# EAGLE board TastsensorX6 (EAGLE 5.00), part 1 of 2
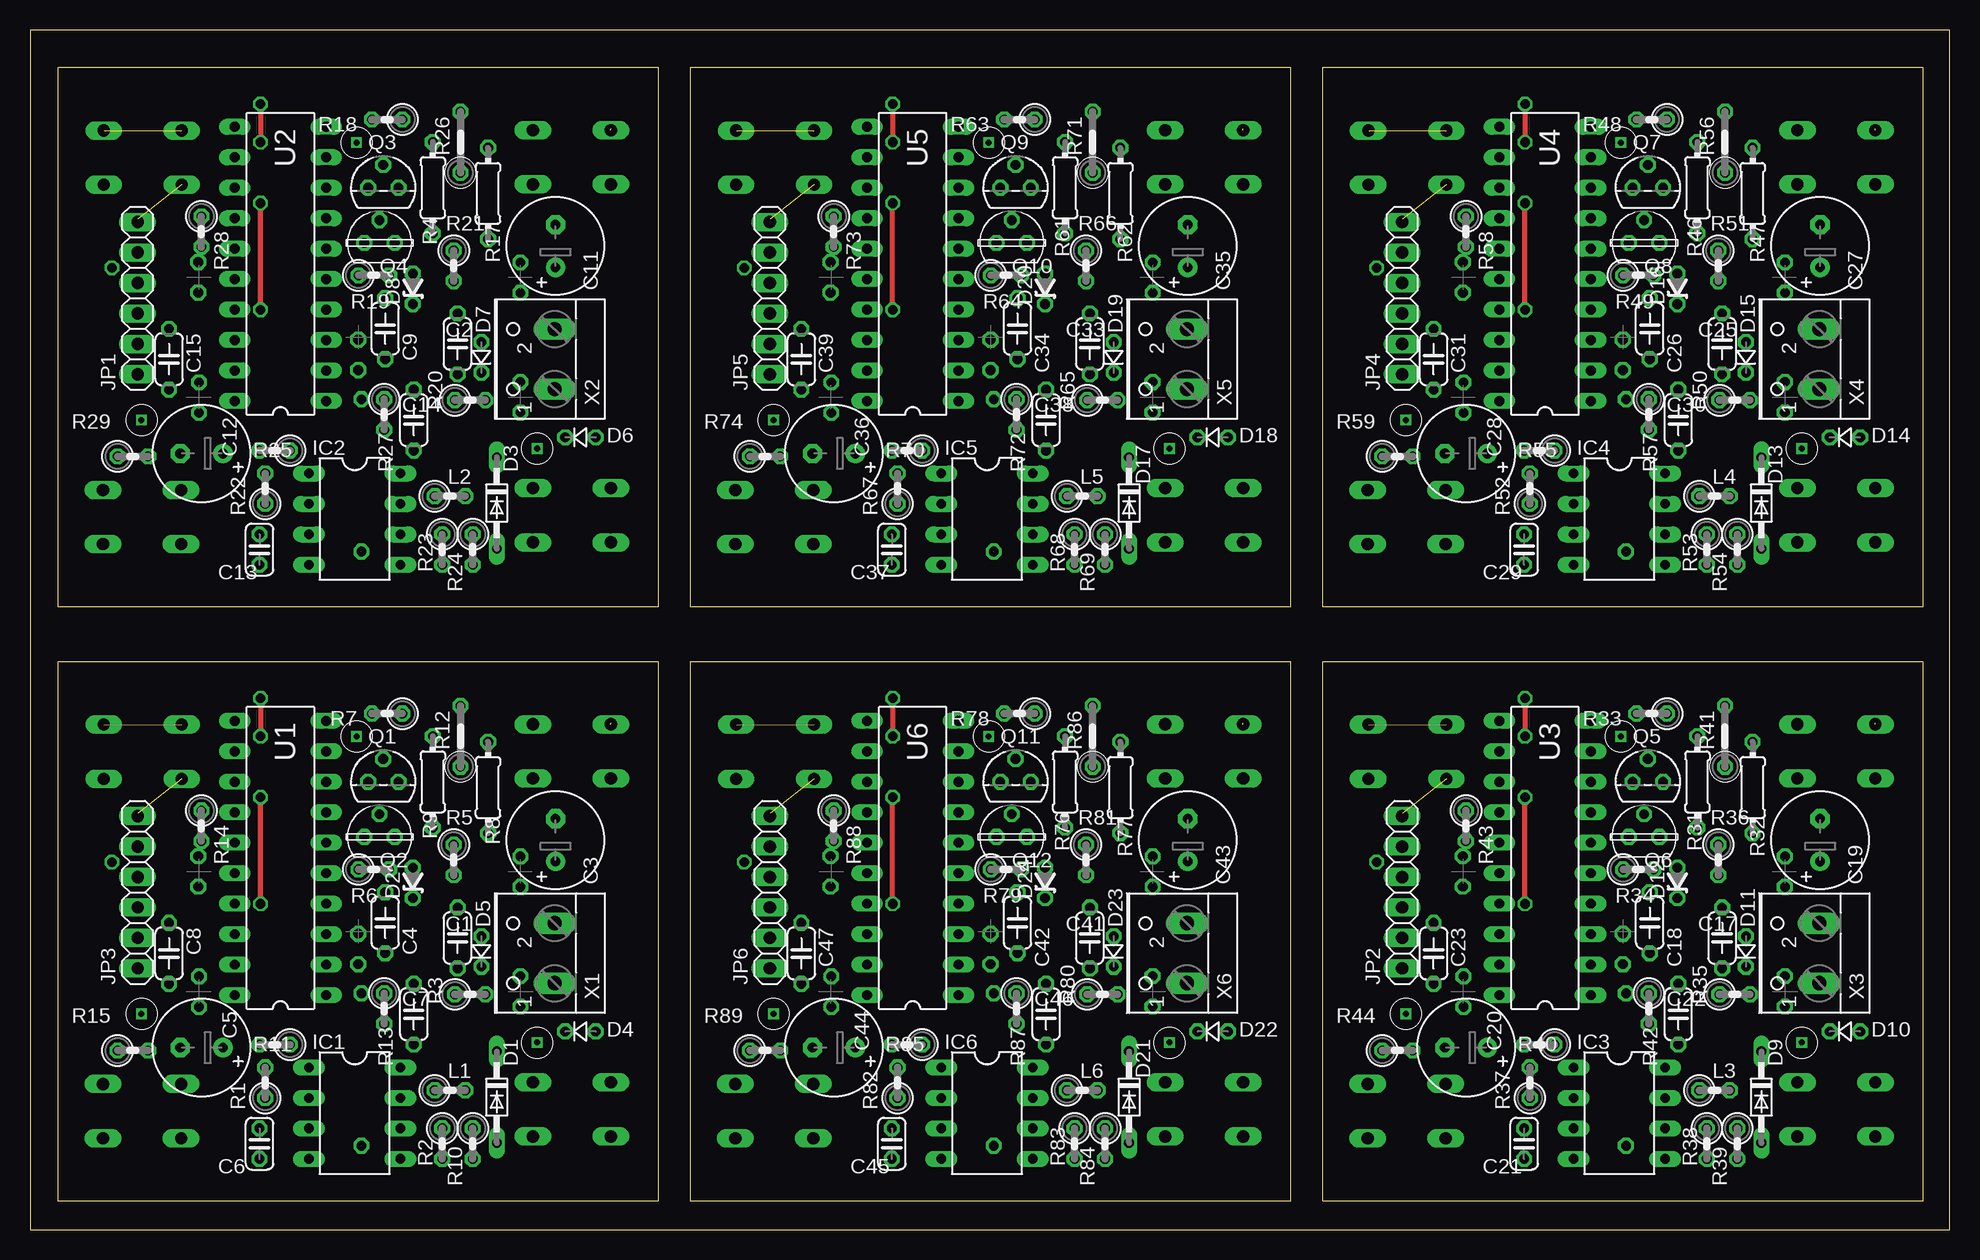
[diagram p0: board, top side]
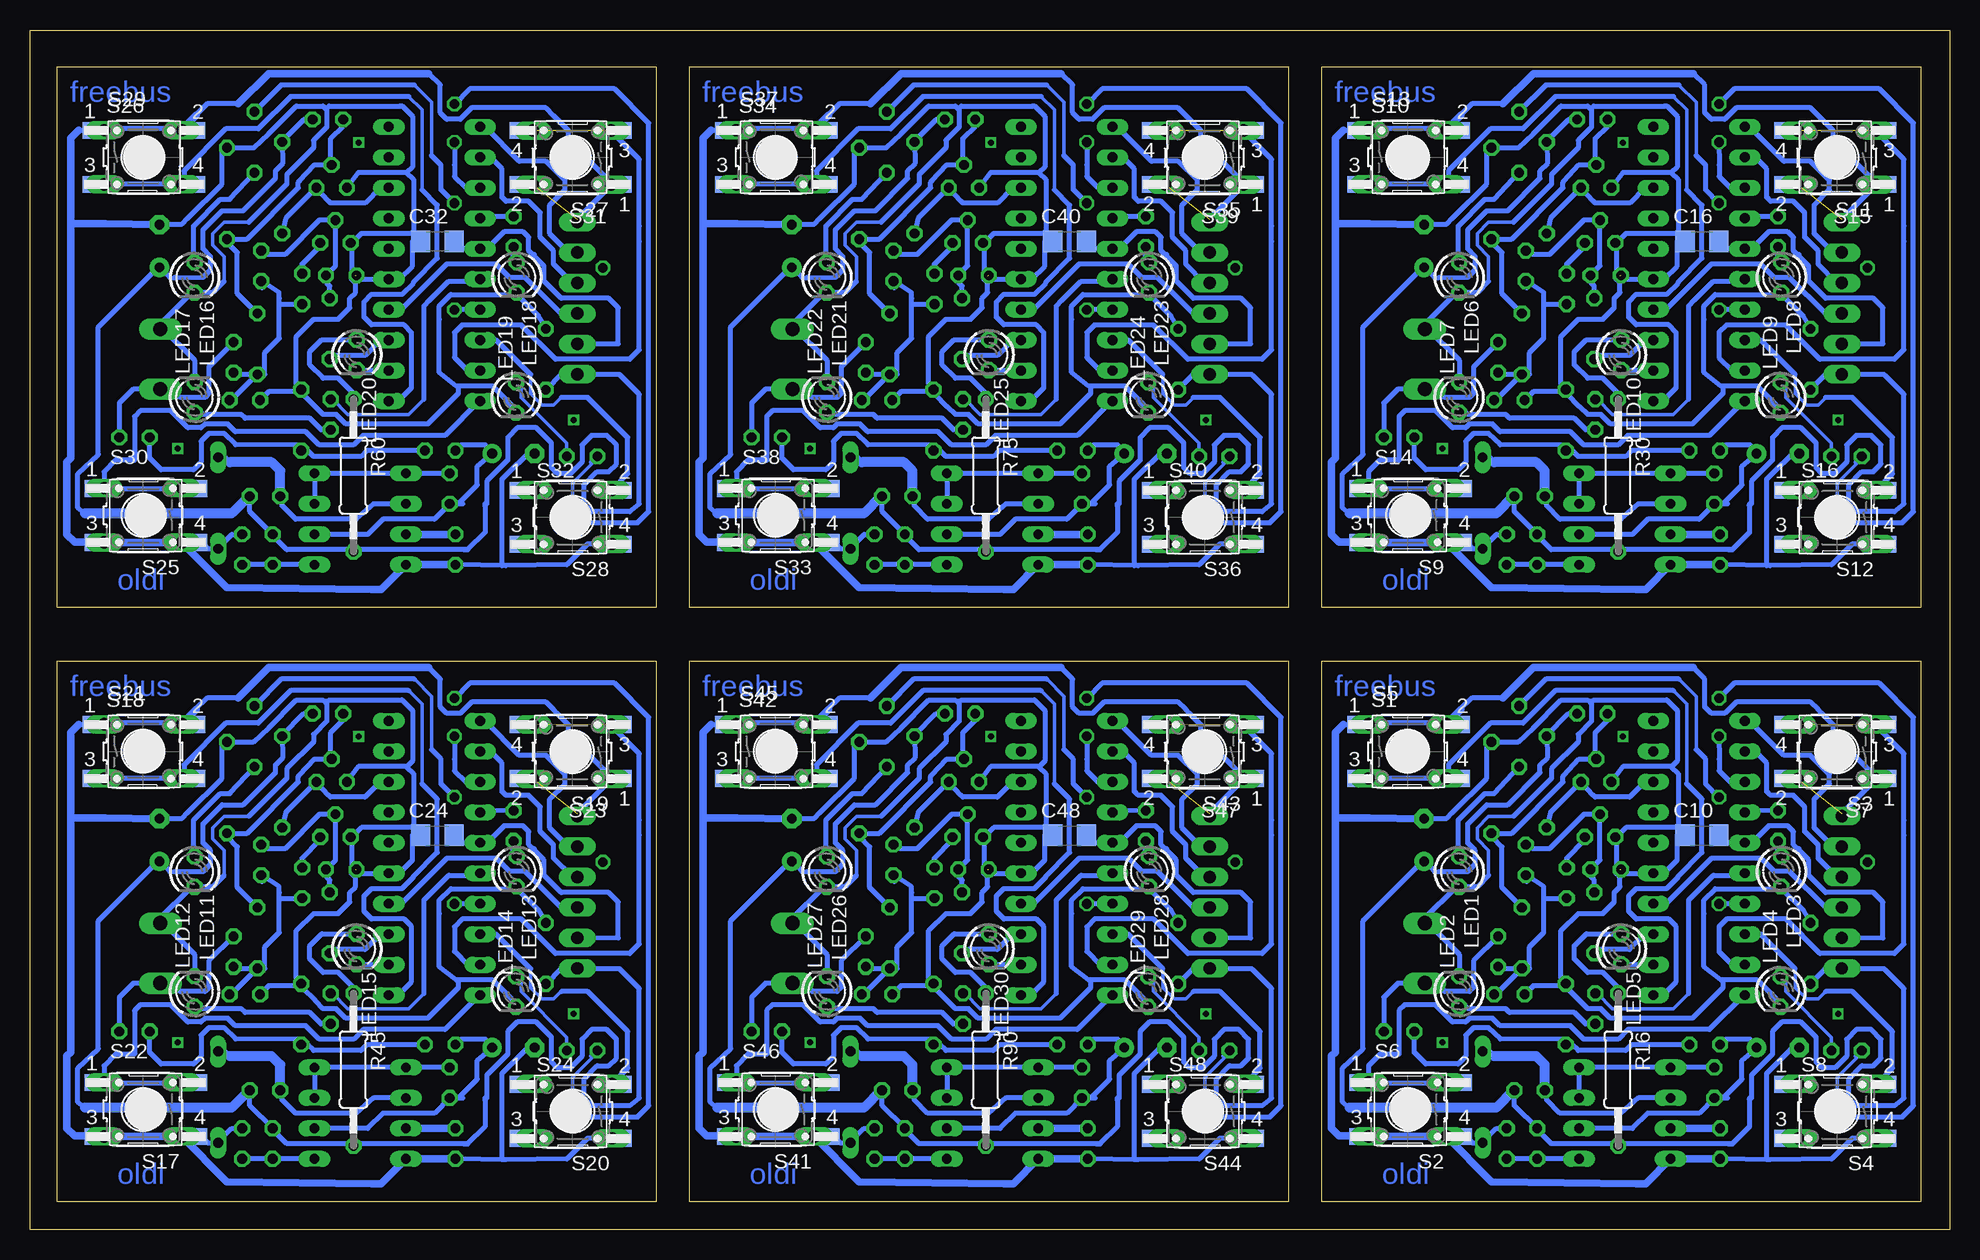
[diagram p1: board, bottom side, seen from below]

Size 160 x 100 mm. Coordinates in mm from the lower left corner, seen from the top.
Outline: 52.34,2.36 2.34,2.36 2.34,47.36 52.34,47.36 52.34,2.36
Outline: 0,0 160,0 160,100 0,100 0,0
Outline: 52.34,51.89 2.34,51.89 2.34,96.89 52.34,96.89 52.34,51.89
Outline: 157.75,2.36 107.75,2.36 107.75,47.36 157.75,47.36 157.75,2.36
Outline: 157.75,51.89 107.75,51.89 107.75,96.89 157.75,96.89 157.75,51.89
Outline: 105.05,51.89 55.05,51.89 55.05,96.89 105.05,96.89 105.05,51.89
Outline: 105.05,2.36 55.05,2.36 55.05,47.36 105.05,47.36 105.05,2.36
Copper layers (1*16): Top 0.035mm / dielectric 1.5mm / Bottom 0.035mm
Design rules "default": minimum track width 10mil, minimum drill 24mil, track to track 8mil, track to pad 8mil, pad to pad 8mil, via to via 8mil, smd to smd 8mil, copper to edge 40mil, drill to drill 8mil, minimum pad ring 10mil, minimum via ring 8mil, stop-mask expansion 4mil, vias tented up to drill 0mil, thermal gap 10mil
tKeepout: area 18.6,46.4 to 36.1,47.4; area 2.3,2.4 to 6.4,47.3; area 2.4,2.4 to 52.3,3.4; area 48.2,2.4 to 52.3,47.3; area 42,40.6 to 48.2,47.3; area 38.5,44 to 41.9,47.3; area 36.9,45.6 to 38.5,47.3; area 45.3,37.3 to 48.1,40.6; area 46.9,35.8 to 48.2,37.3; area 43.7,39 to 45.3,40.6; area 40.3,42.3 to 41.9,44; area 43.2,3.2 to 48.3,10; 210 more areas; 60 lines
bKeepout: area 20.6,20.3 to 21.9,23.6; area 32.8,20.3 to 34.1,30.3; area 47.3,19.6 to 52.3,29.6; area 17.1,20.2 to 22.1,30.2; area 32.7,20.4 to 37.7,30.4; area 2.3,19.6 to 7.3,29.6; area 2.3,2.4 to 52.3,5.1; area 2.3,44.6 to 52.3,47.4; area 24.7,40.6 to 29.8,41.6; area 41.8,13.4 to 42.8,17.8; area 8.8,15.8 to 9.8,20.2; area 50.1,2.4 to 52.3,47.4; 66 more areas

## Footprints (pad centres in the part's own frame; a part is rotated, then mirrored left to right if it is on the bottom)
C050-024X044 = drill 0.813 octagon: 1 -2.54,0; 2 2.54,0
E3,5-8 = drill 0.813 pad 1.6 round: + -1.778,0 | drill 0.813 pad 1.6 octagon: - 1.778,0
C025-024X044 = drill 0.813 octagon: 1 -1.27,0; 2 1.27,0
C1206 = smd 1.6 x 1.8: 1 -1.4,0; 2 1.4,0
DO34-7 = drill 0.813 long: A 3.81,0; C -3.81,0
ZDIO-2.5 = drill 0.813 octagon: A 1.27,0; C -1.27,0
D-2.5 = drill 0.813 octagon: A 1.27,0; C -1.27,0
DIL08 = drill 0.813 long: 1 -3.81,-3.81; 2 -1.27,-3.81; 3 1.27,-3.81; 4 3.81,-3.81; 5 3.81,3.81; 6 1.27,3.81; 7 -1.27,3.81; 8 -3.81,3.81
1X06 = drill 1.016 long: 1 -6.35,0; 2 -3.81,0; 3 -1.27,0; 4 1.27,0; 5 3.81,0; 6 6.35,0
0207/2V@2 = drill 0.813 octagon: 1 -1.27,0; 2 1.27,0
LED3MM = drill 0.813 octagon: A -1.27,0; K 1.27,0
TO92 = drill 0.813 octagon: 1 1.27,0; 2 0,1.905; 3 -1.27,0
TO237 = drill 0.813 octagon: 1 1.27,0; 2 0,1.905; 3 -1.27,0
0207/2V = drill 0.813 octagon: 1 -1.27,0; 2 1.27,0
0204/7 = drill 0.813 octagon: 1 -3.81,0; 2 3.81,0
0207/5V = drill 0.813 octagon: 1 -2.54,0; 2 2.54,0
0207/12 = drill 0.813 octagon: 1 -6.35,0; 2 6.35,0
B3F-10XX = drill 1.016 long: 1 -3.251,2.261; 2 3.251,2.261; 3 -3.251,-2.261; 4 3.251,-2.261
TASTER-9314_SMD = smd 2.1 x 1.4: 1 -4.048,2.25; 2 4.048,2.25; 3 -4.048,-2.25; 4 4.048,-2.25
DIL20 = drill 0.813 long: 1 -11.43,-3.81; 2 -8.89,-3.81; 3 -6.35,-3.81; 4 -3.81,-3.81; 5 -1.27,-3.81; 6 1.27,-3.81; 7 3.81,-3.81; 8 6.35,-3.81; 9 8.89,-3.81; 10 11.43,-3.81; 11 11.43,3.81; 12 8.89,3.81; 13 6.35,3.81; 14 3.81,3.81; 15 1.27,3.81; 16 -1.27,3.81; 17 -3.81,3.81; 18 -6.35,3.81; 19 -8.89,3.81; 20 -11.43,3.81
W237-102 = drill 1.194 long: 1 -2.5,-1.27; 2 2.5,-1.27

## Placement (x,y rotation side)
C1  100n  [C050-024X044]  35.64,24.3 90 top
C2  100n  [C050-024X044]  35.64,73.83 90 top
C3  100µ  [E3,5-8]  43.8,32.46 90 top
C4  100n  [C050-024X044]  29.61,25.57 270 top
C5  100µ  [E3,5-8]  14.3,15.16 180 top
C6  470p  [C025-024X044]  19.13,7.16 270 top
C7  100n  [C050-024X044]  31.99,17.95 270 top
C8  100n  [C050-024X044]  11.59,23.02 270 top
C9  100n  [C050-024X044]  29.61,75.1 270 top
C10  [C1206]  20.64,32.86 0 bottom
C11  100µ  [E3,5-8]  43.8,81.99 90 top
C12  100µ  [E3,5-8]  14.3,64.69 180 top
C13  470p  [C025-024X044]  19.13,56.69 270 top
C14  100n  [C050-024X044]  31.99,67.48 270 top
C15  100n  [C050-024X044]  11.59,72.55 270 top
C16  [C1206]  20.64,82.39 0 bottom
C17  100n  [C050-024X044]  141.05,24.3 90 top
C18  100n  [C050-024X044]  135.02,25.57 270 top
C19  100µ  [E3,5-8]  149.21,32.46 90 top
C20  100µ  [E3,5-8]  119.71,15.16 180 top
C21  470p  [C025-024X044]  124.54,7.16 270 top
C22  100n  [C050-024X044]  137.4,17.95 270 top
C23  100n  [C050-024X044]  117,23.02 270 top
C24  [C1206]  126.05,32.86 0 bottom
C25  100n  [C050-024X044]  141.05,73.83 90 top
C26  100n  [C050-024X044]  135.02,75.1 270 top
C27  100µ  [E3,5-8]  149.21,81.99 90 top
C28  100µ  [E3,5-8]  119.71,64.69 180 top
C29  470p  [C025-024X044]  124.54,56.69 270 top
C30  100n  [C050-024X044]  137.4,67.48 270 top
C31  100n  [C050-024X044]  117,72.55 270 top
C32  [C1206]  126.05,82.39 0 bottom
C33  100n  [C050-024X044]  88.34,73.83 90 top
C34  100n  [C050-024X044]  82.31,75.1 270 top
C35  100µ  [E3,5-8]  96.51,81.99 90 top
C36  100µ  [E3,5-8]  67.01,64.69 180 top
C37  470p  [C025-024X044]  71.83,56.69 270 top
C38  100n  [C050-024X044]  84.69,67.48 270 top
C39  100n  [C050-024X044]  64.29,72.55 270 top
C40  [C1206]  73.34,82.39 0 bottom
C41  100n  [C050-024X044]  88.34,24.3 90 top
C42  100n  [C050-024X044]  82.31,25.57 270 top
C43  100µ  [E3,5-8]  96.51,32.46 90 top
C44  100µ  [E3,5-8]  67.01,15.16 180 top
C45  470p  [C025-024X044]  71.83,7.16 270 top
C46  100n  [C050-024X044]  84.69,17.95 270 top
C47  100n  [C050-024X044]  64.29,23.02 270 top
C48  [C1206]  73.34,32.86 0 bottom
D1  BAT46  [DO34-7]  38.91,11.03 270 top
D2  18V  [ZDIO-2.5]  31.91,28.89 90 top
D3  BAT46  [DO34-7]  38.91,60.56 270 top
D4  4148  [D-2.5]  45.88,16.51 0 top
D5  4148  [D-2.5]  37.62,23.18 90 top
D6  4148  [D-2.5]  45.88,66.04 0 top
D7  4148  [D-2.5]  37.62,72.71 90 top
D8  18V  [ZDIO-2.5]  31.91,78.42 90 top
D9  BAT46  [DO34-7]  144.32,11.03 270 top
D10  4148  [D-2.5]  151.29,16.51 0 top
D11  4148  [D-2.5]  143.03,23.18 90 top
D12  18V  [ZDIO-2.5]  137.32,28.89 90 top
D13  BAT46  [DO34-7]  144.32,60.56 270 top
D14  4148  [D-2.5]  151.29,66.04 0 top
D15  4148  [D-2.5]  143.03,72.71 90 top
D16  18V  [ZDIO-2.5]  137.32,78.42 90 top
D17  BAT46  [DO34-7]  91.61,60.56 270 top
D18  4148  [D-2.5]  98.58,66.04 0 top
D19  4148  [D-2.5]  90.33,72.71 90 top
D20  18V  [ZDIO-2.5]  84.61,78.42 90 top
D21  BAT46  [DO34-7]  91.61,11.03 270 top
D22  4148  [D-2.5]  98.58,16.51 0 top
D23  4148  [D-2.5]  90.33,23.18 90 top
D24  18V  [ZDIO-2.5]  84.61,28.89 90 top
IC1  MC34063AP  [DIL08]  27.07,9.7 270 top
IC2  MC34063AP  [DIL08]  27.07,59.23 270 top
IC3  MC34063AP  [DIL08]  132.48,9.7 270 top
IC4  MC34063AP  [DIL08]  132.48,59.23 270 top
IC5  MC34063AP  [DIL08]  79.77,59.23 270 top
IC6  MC34063AP  [DIL08]  79.77,9.7 270 top
JP1  [1X06]  8.97,77.64 90 top
JP2  [1X06]  114.38,28.11 90 top
JP3  [1X06]  8.97,28.11 90 top
JP4  [1X06]  114.38,77.64 90 top
JP5  [1X06]  61.67,77.64 90 top
JP6  [1X06]  61.67,28.11 90 top
L1  220µ  [0207/2V@2]  35,11.6 0 top
L2  220µ  [0207/2V@2]  35,61.13 0 top
L3  220µ  [0207/2V@2]  140.41,11.6 0 top
L4  220µ  [0207/2V@2]  140.41,61.13 0 top
L5  220µ  [0207/2V@2]  87.71,61.13 0 top
L6  220µ  [0207/2V@2]  87.71,11.6 0 top
LED1  [LED3MM]  40.87,29.83 270 bottom
LED2  [LED3MM]  40.87,19.86 90 bottom
LED3  [LED3MM]  14.02,29.85 270 bottom
LED4  [LED3MM]  14.08,19.83 270 bottom
LED5  [LED3MM]  27.36,23.39 270 bottom
LED6  [LED3MM]  40.87,79.36 270 bottom
LED7  [LED3MM]  40.87,69.39 90 bottom
LED8  [LED3MM]  14.02,79.38 270 bottom
LED9  [LED3MM]  14.08,69.36 270 bottom
LED10  [LED3MM]  27.36,72.92 270 bottom
LED11  [LED3MM]  146.28,29.83 270 bottom
LED12  [LED3MM]  146.28,19.86 90 bottom
LED13  [LED3MM]  119.43,29.85 270 bottom
LED14  [LED3MM]  119.49,19.83 270 bottom
LED15  [LED3MM]  132.77,23.39 270 bottom
LED16  [LED3MM]  146.28,79.36 270 bottom
LED17  [LED3MM]  146.28,69.39 90 bottom
LED18  [LED3MM]  119.43,79.38 270 bottom
LED19  [LED3MM]  119.49,69.36 270 bottom
LED20  [LED3MM]  132.77,72.92 270 bottom
LED21  [LED3MM]  93.58,79.36 270 bottom
LED22  [LED3MM]  93.58,69.39 90 bottom
LED23  [LED3MM]  66.72,79.38 270 bottom
LED24  [LED3MM]  66.79,69.36 270 bottom
LED25  [LED3MM]  80.07,72.92 270 bottom
LED26  [LED3MM]  93.58,29.83 270 bottom
LED27  [LED3MM]  93.58,19.86 90 bottom
LED28  [LED3MM]  66.72,29.85 270 bottom
LED29  [LED3MM]  66.79,19.83 270 bottom
LED30  [LED3MM]  80.07,23.39 270 bottom
Q1  BC557  [TO92]  29.45,37.32 0 top
Q2  2N7000  [TO237]  29.13,32.72 0 top
Q3  BC557  [TO92]  29.45,86.85 0 top
Q4  2N7000  [TO237]  29.13,82.25 0 top
Q5  BC557  [TO92]  134.86,37.32 0 top
Q6  2N7000  [TO237]  134.54,32.72 0 top
Q7  BC557  [TO92]  134.86,86.85 0 top
Q8  2N7000  [TO237]  134.54,82.25 0 top
Q9  BC557  [TO92]  82.15,86.85 0 top
Q10  2N7000  [TO237]  81.83,82.25 0 top
Q11  BC557  [TO92]  82.15,37.32 0 top
Q12  2N7000  [TO237]  81.83,32.72 0 top
R1  3R3  [0207/2V]  19.61,12.24 90 top
R2  3k3  [0207/2V]  34.37,7.16 270 top
R3  100k  [0207/2V]  36.68,19.61 0 top
R4  10k  [0204/7]  33.58,86.85 270 top
R5  390k  [0207/2V]  35.32,30.81 270 top
R6  12k  [0207/2V]  28.65,30.02 0 top
R7  82k  [0207/2V]  29.77,43.01 180 top
R8  47k  [0204/7]  38.18,36.84 270 top
R9  10k  [0204/7]  33.58,37.32 270 top
R10  2k2  [0207/2V]  36.91,7.16 270 top
R11  120  [0207/2V]  20.4,15.41 180 top
R12  1k  [0207/5V]  35.88,41.12 90 top
R13  1k  [0207/2V]  29.53,18.42 270 top
R14  1k  [0207/2V]  14.29,33.66 270 top
R15  1k  [0207/2V]  8.57,14.92 0 top
R16  1k  [0207/12]  27.62,13.34 270 bottom
R17  47k  [0204/7]  38.18,86.37 270 top
R18  82k  [0207/2V]  29.77,92.54 180 top
R19  12k  [0207/2V]  28.65,79.55 0 top
R20  100k  [0207/2V]  36.68,69.14 0 top
R21  390k  [0207/2V]  35.32,80.34 270 top
R22  3R3  [0207/2V]  19.61,61.77 90 top
R23  3k3  [0207/2V]  34.37,56.69 270 top
R24  2k2  [0207/2V]  36.91,56.69 270 top
R25  120  [0207/2V]  20.4,64.94 180 top
R26  1k  [0207/5V]  35.88,90.65 90 top
R27  1k  [0207/2V]  29.53,67.95 270 top
R28  1k  [0207/2V]  14.29,83.19 270 top
R29  1k  [0207/2V]  8.57,64.45 0 top
R30  1k  [0207/12]  27.62,62.87 270 bottom
R31  10k  [0204/7]  138.99,37.32 270 top
R32  47k  [0204/7]  143.59,36.84 270 top
R33  82k  [0207/2V]  135.18,43.01 180 top
R34  12k  [0207/2V]  134.06,30.02 0 top
R35  100k  [0207/2V]  142.09,19.61 0 top
R36  390k  [0207/2V]  140.73,30.81 270 top
R37  3R3  [0207/2V]  125.02,12.24 90 top
R38  3k3  [0207/2V]  139.78,7.16 270 top
R39  2k2  [0207/2V]  142.32,7.16 270 top
R40  120  [0207/2V]  125.81,15.41 180 top
R41  1k  [0207/5V]  141.29,41.12 90 top
R42  1k  [0207/2V]  134.94,18.42 270 top
R43  1k  [0207/2V]  119.7,33.66 270 top
R44  1k  [0207/2V]  113.98,14.92 0 top
R45  1k  [0207/12]  133.03,13.34 270 bottom
R46  10k  [0204/7]  138.99,86.85 270 top
R47  47k  [0204/7]  143.59,86.37 270 top
R48  82k  [0207/2V]  135.18,92.54 180 top
R49  12k  [0207/2V]  134.06,79.55 0 top
R50  100k  [0207/2V]  142.09,69.14 0 top
R51  390k  [0207/2V]  140.73,80.34 270 top
R52  3R3  [0207/2V]  125.02,61.77 90 top
R53  3k3  [0207/2V]  139.78,56.69 270 top
R54  2k2  [0207/2V]  142.32,56.69 270 top
R55  120  [0207/2V]  125.81,64.94 180 top
R56  1k  [0207/5V]  141.29,90.65 90 top
R57  1k  [0207/2V]  134.94,67.95 270 top
R58  1k  [0207/2V]  119.7,83.19 270 top
R59  1k  [0207/2V]  113.98,64.45 0 top
R60  1k  [0207/12]  133.03,62.87 270 bottom
R61  10k  [0204/7]  86.28,86.85 270 top
R62  47k  [0204/7]  90.88,86.37 270 top
R63  82k  [0207/2V]  82.47,92.54 180 top
R64  12k  [0207/2V]  81.36,79.55 0 top
R65  100k  [0207/2V]  89.39,69.14 0 top
R66  390k  [0207/2V]  88.03,80.34 270 top
R67  3R3  [0207/2V]  72.31,61.77 90 top
R68  3k3  [0207/2V]  87.07,56.69 270 top
R69  2k2  [0207/2V]  89.61,56.69 270 top
R70  120  [0207/2V]  73.1,64.94 180 top
R71  1k  [0207/5V]  88.58,90.65 90 top
R72  1k  [0207/2V]  82.23,67.95 270 top
R73  1k  [0207/2V]  66.99,83.19 270 top
R74  1k  [0207/2V]  61.28,64.45 0 top
R75  1k  [0207/12]  80.33,62.87 270 bottom
R76  10k  [0204/7]  86.28,37.32 270 top
R77  47k  [0204/7]  90.88,36.84 270 top
R78  82k  [0207/2V]  82.47,43.01 180 top
R79  12k  [0207/2V]  81.36,30.02 0 top
R80  100k  [0207/2V]  89.39,19.61 0 top
R81  390k  [0207/2V]  88.03,30.81 270 top
R82  3R3  [0207/2V]  72.31,12.24 90 top
R83  3k3  [0207/2V]  87.07,7.16 270 top
R84  2k2  [0207/2V]  89.61,7.16 270 top
R85  120  [0207/2V]  73.1,15.41 180 top
R86  1k  [0207/5V]  88.58,41.12 90 top
R87  1k  [0207/2V]  82.23,18.42 270 top
R88  1k  [0207/2V]  66.99,33.66 270 top
R89  1k  [0207/2V]  61.28,14.92 0 top
R90  1k  [0207/12]  80.33,13.34 270 bottom
S1  [B3F-10XX]  45.16,39.86 0 bottom
S2  [B3F-10XX]  45.16,10.02 180 bottom
S3  [B3F-10XX]  9.39,39.83 180 bottom
S4  [B3F-10XX]  9.34,9.87 180 bottom
S5  [TASTER-9314_SMD]  45.09,39.85 0 bottom
S6  [TASTER-9314_SMD]  44.93,10 0 bottom
S7  [TASTER-9314_SMD]  9.52,39.85 180 bottom
S8  [TASTER-9314_SMD]  9.53,9.84 0 bottom
S9  [B3F-10XX]  45.16,59.55 180 bottom
S10  [B3F-10XX]  45.16,89.39 0 bottom
S11  [B3F-10XX]  9.39,89.36 180 bottom
S12  [B3F-10XX]  9.34,59.4 180 bottom
S13  [TASTER-9314_SMD]  45.09,89.38 0 bottom
S14  [TASTER-9314_SMD]  44.93,59.53 0 bottom
S15  [TASTER-9314_SMD]  9.52,89.38 180 bottom
S16  [TASTER-9314_SMD]  9.53,59.37 0 bottom
S17  [B3F-10XX]  150.57,10.02 180 bottom
S18  [B3F-10XX]  150.57,39.86 0 bottom
S19  [B3F-10XX]  114.8,39.83 180 bottom
S20  [B3F-10XX]  114.75,9.87 180 bottom
S21  [TASTER-9314_SMD]  150.5,39.85 0 bottom
S22  [TASTER-9314_SMD]  150.34,10 0 bottom
S23  [TASTER-9314_SMD]  114.93,39.85 180 bottom
S24  [TASTER-9314_SMD]  114.94,9.84 0 bottom
S25  [B3F-10XX]  150.57,59.55 180 bottom
S26  [B3F-10XX]  150.57,89.39 0 bottom
S27  [B3F-10XX]  114.8,89.36 180 bottom
S28  [B3F-10XX]  114.75,59.4 180 bottom
S29  [TASTER-9314_SMD]  150.5,89.38 0 bottom
S30  [TASTER-9314_SMD]  150.34,59.53 0 bottom
S31  [TASTER-9314_SMD]  114.93,89.38 180 bottom
S32  [TASTER-9314_SMD]  114.94,59.37 0 bottom
S33  [B3F-10XX]  97.87,59.55 180 bottom
S34  [B3F-10XX]  97.87,89.39 0 bottom
S35  [B3F-10XX]  62.1,89.36 180 bottom
S36  [B3F-10XX]  62.05,59.4 180 bottom
S37  [TASTER-9314_SMD]  97.79,89.38 0 bottom
S38  [TASTER-9314_SMD]  97.63,59.53 0 bottom
S39  [TASTER-9314_SMD]  62.23,89.38 180 bottom
S40  [TASTER-9314_SMD]  62.23,59.37 0 bottom
S41  [B3F-10XX]  97.87,10.02 180 bottom
S42  [B3F-10XX]  97.87,39.86 0 bottom
S43  [B3F-10XX]  62.1,39.83 180 bottom
S44  [B3F-10XX]  62.05,9.87 180 bottom
S45  [TASTER-9314_SMD]  97.79,39.85 0 bottom
S46  [TASTER-9314_SMD]  97.63,10 0 bottom
S47  [TASTER-9314_SMD]  62.23,39.85 180 bottom
S48  [TASTER-9314_SMD]  62.23,9.84 0 bottom
U1  89LPC922  [DIL20]  20.88,30.97 90 top
U2  89LPC922  [DIL20]  20.88,80.5 90 top
U3  89LPC922  [DIL20]  126.28,30.97 90 top
U4  89LPC922  [DIL20]  126.28,80.5 90 top
U5  89LPC922  [DIL20]  73.58,80.5 90 top
U6  89LPC922  [DIL20]  73.58,30.97 90 top
X1  [W237-102]  42.47,23.03 90 top
X2  [W237-102]  42.47,72.56 90 top
X3  [W237-102]  147.88,23.03 90 top
X4  [W237-102]  147.88,72.56 90 top
X5  [W237-102]  95.17,72.56 90 top
X6  [W237-102]  95.17,23.03 90 top

## Library data of the parts
C1-C48 L1-L6 R1-R90 = rcl
D1-D24 = diode
IC1-IC6 = mc34063
JP1-JP6 = pinhead
LED1-LED30 = led
Q1 Q3 Q5 Q7 Q9 Q11 = transistor-pnp
Q2 Q4 Q6 Q8 Q10 Q12 = transistor-fet
S1-S4 S9-S12 S17-S20 S25-S28 S33-S36 S41-S44 = switch-omron
S5-S8 S13-S16 S21-S24 S29-S32 S37-S40 S45-S48 = Ergaenzung
U1-U6 = micro-philips
X1-X6 = con-wago-500

## Nets
GND: C3.- C5.- C6.2 C7.1 C8.1 C10.1 D1.A IC1.4 JP3.6 LED1.K LED2.K LED3.K LED4.K Q1.3 Q2.3 R3.1 R6.1 R8.1 R10.1 S1.1 S1.2 S2.1 S2.2 S3.1 S3.2 S4.1 U1.5 X1.2
GND1: C11.- C12.- C13.2 C14.1 C15.1 C16.1 D3.A IC2.4 JP1.6 LED6.K LED7.K LED8.K LED9.K Q3.3 Q4.3 R17.1 R19.1 R20.1 R24.1 S9.1 S9.2 S10.1 S10.2 S11.1 S11.2 S12.1 U2.5 X2.2
GND2: C19.- C20.- C21.2 C22.1 C23.1 C24.1 D9.A IC3.4 JP2.6 LED11.K LED12.K LED13.K LED14.K Q5.3 Q6.3 R32.1 R34.1 R35.1 R39.1 S17.1 S17.2 S18.1 S18.2 S19.1 S19.2 S20.1 U3.5 X3.2
GND3: C27.- C28.- C29.2 C30.1 C31.1 C32.1 D13.A IC4.4 JP4.6 LED16.K LED17.K LED18.K LED19.K Q7.3 Q8.3 R47.1 R49.1 R50.1 R54.1 S25.1 S25.2 S26.1 S26.2 S27.1 S27.2 S28.1 U4.5 X4.2
GND4: C35.- C36.- C37.2 C38.1 C39.1 C40.1 D17.A IC5.4 JP5.6 LED21.K LED22.K LED23.K LED24.K Q9.3 Q10.3 R62.1 R64.1 R65.1 R69.1 S33.1 S33.2 S34.1 S34.2 S35.1 S35.2 S36.1 U5.5 X5.2
GND5: C43.- C44.- C45.2 C46.1 C47.1 C48.1 D21.A IC6.4 JP6.6 LED26.K LED27.K LED28.K LED29.K Q11.3 Q12.3 R77.1 R79.1 R80.1 R84.1 S41.1 S41.2 S42.1 S42.2 S43.1 S43.2 S44.1 U6.5 X6.2
N$1: Q1.1 R9.2 U1.8
N$2: C1.2 Q1.2 R7.2 R8.2
N$3: D4.A D5.A X1.1
N$4: C1.1 D2.C D5.C R3.2 R5.2
N$5: C4.2 U1.3
N$6: D2.A Q2.1
N$8: IC1.1 IC1.7 IC1.8 R1.2
N$10: C5.+ IC1.6 R1.1 R11.2
N$11: IC1.5 R2.2 R10.2
N$12: D1.C IC1.2 L1.1
N$13: C7.2 D4.C R11.1
N$14: C6.1 IC1.3
N$16: LED4.A R15.2
N$17: LED1.A R12.1
N$18: LED2.A R13.2
N$19: LED3.A R14.2
N$20: LED5.A R16.1
N$21: R12.2 U1.17
N$22: R13.1 U1.16
N$23: R14.1 U1.14
N$24: R15.1 U1.13
N$25: LED5.K U1.2
N$26: Q3.1 R4.2 U2.8
N$27: C2.2 Q3.2 R17.2 R18.2
N$28: C9.2 U2.3
N$29: JP3.4 U1.12
N$30: JP3.5 U1.11
N$31: JP3.3 U1.4
N$32: C10.2 JP3.2 U1.15
N$33: D8.A Q4.1
N$34: C4.1 Q2.2 R5.1 R6.2
N$35: JP1.5 U2.11
N$36: JP1.3 U2.4
N$37: JP1.4 U2.12
N$38: C16.2 JP1.2 U2.15
N$39: C9.1 Q4.2 R19.2 R21.1
N$40: C2.1 D7.C D8.C R20.2 R21.2
N$41: IC2.1 IC2.7 IC2.8 R22.2
N$42: C12.+ IC2.6 R22.1 R25.2
N$43: IC2.5 R23.2 R24.2
N$44: D3.C IC2.2 L2.1
N$45: C13.1 IC2.3
N$46: C14.2 D6.C R25.1
N$47: D6.A D7.A X2.1
N$51: LED6.A R26.1
N$52: R26.2 U2.17
N$53: R27.1 U2.16
N$54: R28.1 U2.14
N$55: R29.1 U2.13
N$56: LED8.A R28.2
N$57: LED9.A R29.2
N$58: LED7.A R27.2
N$59: LED10.K U2.2
N$60: LED10.A R30.1
N$61: Q5.1 R31.2 U3.8
N$62: C17.2 Q5.2 R32.2 R33.2
N$63: C18.2 U3.3
N$64: D12.A Q6.1
N$65: JP2.5 U3.11
N$66: JP2.3 U3.4
N$67: JP2.4 U3.12
N$68: C24.2 JP2.2 U3.15
N$69: C18.1 Q6.2 R34.2 R36.1
N$70: C17.1 D11.C D12.C R35.2 R36.2
N$71: IC3.1 IC3.7 IC3.8 R37.2
N$72: C20.+ IC3.6 R37.1 R40.2
N$73: IC3.5 R38.2 R39.2
N$74: D9.C IC3.2 L3.1
N$75: C21.1 IC3.3
N$76: C22.2 D10.C R40.1
N$77: D10.A D11.A X3.1
N$81: LED11.A R41.1
N$82: R41.2 U3.17
N$83: R42.1 U3.16
N$84: R43.1 U3.14
N$85: R44.1 U3.13
N$86: LED13.A R43.2
N$87: LED14.A R44.2
N$88: LED12.A R42.2
N$89: LED15.K U3.2
N$90: LED15.A R45.1
N$91: Q7.1 R46.2 U4.8
N$92: C25.2 Q7.2 R47.2 R48.2
N$93: C26.2 U4.3
N$94: D16.A Q8.1
N$95: JP4.5 U4.11
N$96: JP4.3 U4.4
N$97: JP4.4 U4.12
N$98: C32.2 JP4.2 U4.15
N$99: C26.1 Q8.2 R49.2 R51.1
N$100: C25.1 D15.C D16.C R50.2 R51.2
N$101: IC4.1 IC4.7 IC4.8 R52.2
N$102: C28.+ IC4.6 R52.1 R55.2
N$103: IC4.5 R53.2 R54.2
N$104: D13.C IC4.2 L4.1
N$105: C29.1 IC4.3
N$106: C30.2 D14.C R55.1
N$107: D14.A D15.A X4.1
N$111: LED16.A R56.1
N$112: R56.2 U4.17
N$113: R57.1 U4.16
N$114: R58.1 U4.14
N$115: R59.1 U4.13
N$116: LED18.A R58.2
N$117: LED19.A R59.2
N$118: LED17.A R57.2
N$119: LED20.K U4.2
N$120: LED20.A R60.1
N$121: Q9.1 R61.2 U5.8
N$122: C33.2 Q9.2 R62.2 R63.2
N$123: C34.2 U5.3
N$124: D20.A Q10.1
N$125: JP5.5 U5.11
N$126: JP5.3 U5.4
N$127: JP5.4 U5.12
N$128: C40.2 JP5.2 U5.15
N$129: C34.1 Q10.2 R64.2 R66.1
N$130: C33.1 D19.C D20.C R65.2 R66.2
N$131: IC5.1 IC5.7 IC5.8 R67.2
N$132: C36.+ IC5.6 R67.1 R70.2
N$133: IC5.5 R68.2 R69.2
N$134: D17.C IC5.2 L5.1
N$135: C37.1 IC5.3
N$136: C38.2 D18.C R70.1
N$137: D18.A D19.A X5.1
N$141: LED21.A R71.1
N$142: R71.2 U5.17
N$143: R72.1 U5.16
N$144: R73.1 U5.14
N$145: R74.1 U5.13
N$146: LED23.A R73.2
N$147: LED24.A R74.2
N$148: LED22.A R72.2
N$149: LED25.K U5.2
N$150: LED25.A R75.1
N$151: Q11.1 R76.2 U6.8
N$152: C41.2 Q11.2 R77.2 R78.2
N$153: C42.2 U6.3
N$154: D24.A Q12.1
N$155: JP6.5 U6.11
N$156: JP6.3 U6.4
N$157: JP6.4 U6.12
N$158: C48.2 JP6.2 U6.15
N$159: C42.1 Q12.2 R79.2 R81.1
N$160: C41.1 D23.C D24.C R80.2 R81.2
N$161: IC6.1 IC6.7 IC6.8 R82.2
N$162: C44.+ IC6.6 R82.1 R85.2
N$163: IC6.5 R83.2 R84.2
N$164: D21.C IC6.2 L6.1
N$165: C45.1 IC6.3
N$166: C46.2 D22.C R85.1
N$167: D22.A D23.A X6.1
N$171: LED26.A R86.1
N$172: R86.2 U6.17
N$173: R87.1 U6.16
N$174: R88.1 U6.14
N$175: R89.1 U6.13
N$176: LED28.A R88.2
N$177: LED29.A R89.2
N$178: LED27.A R87.2
N$179: LED30.K U6.2
N$180: LED30.A R90.1
P0.0: S1.3 S1.4 U1.1
P0.1: S2.3 S2.4 U1.20
P0.2: S3.3 S3.4 U1.19
P0.3: S4.3 U1.18
P0.4: S10.3 S10.4 U2.1
P0.5: S9.3 S9.4 U2.20
P0.6: S11.3 S11.4 U2.19
P0.7: S12.3 U2.18
P0.8: S18.3 S18.4 U3.1
P0.9: S17.3 S17.4 U3.20
P0.10: S19.3 S19.4 U3.19
P0.11: S20.3 U3.18
P0.12: S26.3 S26.4 U4.1
P0.13: S25.3 S25.4 U4.20
P0.14: S27.3 S27.4 U4.19
P0.15: S28.3 U4.18
P0.16: S34.3 S34.4 U5.1
P0.17: S33.3 S33.4 U5.20
P0.18: S35.3 S35.4 U5.19
P0.19: S36.3 U5.18
P0.20: S42.3 S42.4 U6.1
P0.21: S41.3 S41.4 U6.20
P0.22: S43.3 S43.4 U6.19
P0.23: S44.3 U6.18
VCC: C3.+ C8.2 JP3.1 L1.2 R2.1 R7.1 R9.1 R16.2
VCC1: C11.+ C15.2 JP1.1 L2.2 R4.1 R18.1 R23.1 R30.2
VCC2: C19.+ C23.2 JP2.1 L3.2 R31.1 R33.1 R38.1 R45.2
VCC3: C27.+ C31.2 JP4.1 L4.2 R46.1 R48.1 R53.1 R60.2
VCC4: C35.+ C39.2 JP5.1 L5.2 R61.1 R63.1 R68.1 R75.2
VCC5: C43.+ C47.2 JP6.1 L6.2 R76.1 R78.1 R83.1 R90.2

## Tracks (layer width: path | path; a pad name or v marks a point on that pad's centre or on a via)
GND  (via drill 0.8)  (3 unrouted)
  Bottom 0.305: 36.35,34.45 38.42,34.45 39.37,33.5 39.37,32.54 38.42,31.59 38.42,29.53
  Bottom 0.406: 22.62,33.51 26.97,33.51 27.78,32.7 | 27.78,32.7 Q2.3 | 22.62,33.51 22.67,33.46 | 22.67,33.46 22.62,33.51 | Q1.3 27.23,38.59 23.19,38.59 23.18,38.58 | 21.35,46.84 20.4,45.89 20.4,43.58 19.84,43.02 18.73,43.02 17.78,43.97 11.59,43.97 10.95,43.34 10.64,43.02 9.68,42.07 9.68,41.27 6.14,37.73 S3.1 6.14,37.51 8.97,34.69 JP3.6 | S4.1 6.11,7.62 8.1,7.62 9.83,5.89 14.94,5.82 | 14.94,5.82 C6.2 | 42.07,42.23 48.42,42.23 | 15.24,10.57 15.24,13.02 12.54,15.72 12.54,15.56 12.54,15.5 C5.- 12.52,15.38 | 41.91,7.78 41.83,7.86 | C3.- 43.81,34.26 43.18,34.29 41.91,34.29 41.43,34.77 38.58,37.62 38.58,40.32 38.24,40.34 R8.1 37.95,40.65 37.94,40.64 37.77,40.65 35.96,40.65 34.69,41.83 32.38,44.13 30.16,44.13 29.84,43.81 | 51.2,25.66 51.17,25.66 | 14.94,5.82 15.24,5.82 15.24,10.57 | 15.24,10.57 15.26,10.57 | 22.62,33.51 22.62,38.02 23.18,38.58 | 23.18,38.58 22.7,39.05 22.7,43.27 23.57,44.15 23.75,44.13 29.69,44.13 29.84,43.97 29.84,43.81 | S1.1 48.47,42.12 48.58,42.23 48.68,42.12 50.52,42.12 | 27.78,32.7 27.78,29.69 27.46,29.37 27.45,29.38 R6.1 27.08,29.69 24.7,29.69 U1.5 24.62,29.7 24.61,29.69 23.81,29.69 22.7,30.8 22.7,32.86 C10.1 | LED2.K 40.87,22.93 43.73,25.8 X1.2 43.79,25.85 43.81,25.88 41.2,28.49 40.96,28.49 40.96,28.56 | LED1.K 40.65,28.56 | 40.77,43.31 40.8,43.34 39.83,44.3 37.23,44.3 | 40.77,43.31 | 36.35,34.45 33.18,37.62 33.18,38.42 30.96,40.64 30.96,41.27 29.84,42.39 29.84,43.81 | 18.89,20.8 19.05,20.8 20.48,21.91 20.48,26.35 20.48,27.46 19.53,28.42 14.19,28.42 LED3.K 13.97,28.58 13.97,28.42 12.22,26.67 C8.1 | 18.89,20.8 18.89,20.16 21.43,17.62 28.26,17.62 29.05,18.41 30.16,18.41 30.8,19.05 31.91,20.16 31.91,20.48 31.97,20.48 C7.1 32.07,20.41 32.07,20.32 34.7,20.32 R3.1
  Bottom 0.406: 40.96,28.57 40.96,28.56 | 40.96,28.56 LED1.K | 40.96,28.57 40.89,28.57 LED1.K | 38.42,29.53 39.37,28.57 40.96,28.57 | 18.89,20.8 16.03,20.8 14.45,19.21 14.13,18.57 14.1,18.57 LED4.K | R10.1 37.77,8.43 38.91,7.29 D1.A 39.77,7.22 40.32,7.78 41.91,7.78 | 41.91,7.78 S2.1 | 27.46,30 27.46,28.57 27.94,28.1 27.94,27.3 28.89,26.35 30.96,26.35 32.38,24.92 32.38,20.95 32.07,20.64 | S3.2 | C8.1 | 22.7,33.66 22.7,33.62 22.67,33.46 | C8.1 | C8.1
  Bottom 0.61: 50.52,42.12 51.2,41.45 51.2,34.3 | 51.2,34.3 51.2,25.66 51.2,14.78 51.51,14.46 51.51,8.43 50.88,7.79 48.34,7.79 48.38,7.75 S2.1 42.03,7.75 41.99,7.79 | 41.99,42.08 42.03,42.12 S1.2 | 41.99,7.79 41.95,7.75 | 41.99,7.79 38.18,3.98 26.11,3.82 25.32,3.82 IC1.4 C6.2 | 41.99,42.08 41.95,42.12 | 41.99,42.08 40.77,43.31 40.72,43.35 | 37.23,44.3 34.69,46.84 21.35,46.84 | 51.2,34.3 48.34,34.3 C3.-
  other vias: 6.83,30.64
GND1  (via drill 0.8)  (3 unrouted)
  Bottom 0.305: 36.35,83.98 38.42,83.98 39.37,83.03 39.37,82.07 38.42,81.12 38.42,79.06
  Bottom 0.406: 22.62,83.04 26.97,83.04 27.78,82.23 | 27.78,82.23 Q4.3 | 22.62,83.04 22.67,82.99 | 22.67,82.99 22.62,83.04 | Q3.3 27.23,88.12 23.19,88.12 23.18,88.11 | 21.35,96.38 20.4,95.42 20.4,93.11 19.84,92.55 18.73,92.55 17.78,93.5 11.59,93.5 10.95,92.87 10.64,92.55 9.68,91.6 9.68,90.81 6.14,87.26 S11.1 6.14,87.04 8.97,84.22 JP1.6 | S12.1 6.11,57.15 8.1,57.15 9.83,55.42 14.94,55.34 | 14.94,55.34 C13.2 | 42.07,91.76 48.42,91.76 | 15.24,60.1 15.24,62.55 12.54,65.25 12.54,65.09 12.54,65.03 C12.- 12.52,64.91 | 41.91,57.31 41.83,57.39 | C11.- 43.81,83.78 43.18,83.82 41.91,83.82 41.43,84.3 38.58,87.15 38.58,89.85 38.24,89.87 R17.1 37.95,90.18 37.94,90.17 37.77,90.18 35.96,90.18 34.69,91.36 32.38,93.66 30.16,93.66 29.84,93.34 | 51.2,75.19 51.17,75.19 | 14.94,55.34 15.24,55.34 15.24,60.1 | 15.24,60.1 15.26,60.1 | 22.62,83.04 22.62,87.55 23.18,88.11 | 23.18,88.11 22.7,88.58 22.7,92.8 23.57,93.68 23.75,93.66 29.69,93.66 29.84,93.5 29.84,93.34 | S10.1 48.47,91.65 48.58,91.76 48.68,91.65 50.52,91.65 | 27.78,82.23 27.78,79.22 27.46,78.9 27.45,78.91 R19.1 27.08,79.22 24.7,79.22 U2.5 24.62,79.23 24.61,79.22 23.81,79.22 22.7,80.33 22.7,82.39 C16.1 | LED7.K 40.87,72.46 43.73,75.33 X2.2 43.79,75.38 43.81,75.41 41.2,78.02 40.96,78.02 40.96,78.09 | LED6.K 40.65,78.09 | 40.77,92.84 40.8,92.87 39.83,93.83 37.23,93.83 | 40.77,92.84 | 36.35,83.98 33.18,87.15 33.18,87.95 30.96,90.17 30.96,90.81 29.84,91.92 29.84,93.34 | 18.89,70.33 19.05,70.33 20.48,71.44 20.48,75.88 20.48,76.99 19.53,77.95 14.19,77.95 LED8.K 13.97,78.11 13.97,77.95 12.22,76.2 C15.1 | 18.89,70.33 18.89,69.69 21.43,67.15 28.26,67.15 29.05,67.94 30.16,67.94 30.8,68.58 31.91,69.69 31.91,70.01 31.97,70.01 C14.1 32.07,69.94 32.07,69.85 34.7,69.85 R20.1
  Bottom 0.406: 40.96,78.11 40.96,78.09 | 40.96,78.09 LED6.K | 40.96,78.11 40.89,78.11 LED6.K | 38.42,79.06 39.37,78.11 40.96,78.11 | 18.89,70.33 16.03,70.33 14.45,68.74 14.13,68.1 14.1,68.1 LED9.K | R24.1 37.77,57.96 38.91,56.82 D3.A 39.77,56.75 40.32,57.31 41.91,57.31 | 41.91,57.31 S9.1 | 27.46,79.53 27.46,78.11 27.94,77.63 27.94,76.83 28.89,75.88 30.96,75.88 32.38,74.45 32.38,70.48 32.07,70.17 | S11.2 | C15.1 | 22.7,83.19 22.7,83.15 22.67,82.99 | C15.1 | C15.1
  Bottom 0.61: 50.52,91.65 51.2,90.98 51.2,83.83 | 51.2,83.83 51.2,75.19 51.2,64.31 51.51,63.99 51.51,57.96 50.88,57.32 48.34,57.32 48.38,57.28 S9.1 42.03,57.28 41.99,57.32 | 41.99,91.61 42.03,91.65 S10.2 | 41.99,57.32 41.95,57.28 | 41.99,57.32 38.18,53.51 26.11,53.35 25.32,53.35 IC2.4 C13.2 | 41.99,91.61 41.95,91.65 | 41.99,91.61 40.77,92.84 40.72,92.88 | 37.23,93.83 34.69,96.38 21.35,96.38 | 51.2,83.83 48.34,83.83 C11.-
  other vias: 6.83,80.17
GND2  (via drill 0.8)  (3 unrouted)
  Bottom 0.305: 141.76,34.45 143.83,34.45 144.78,33.5 144.78,32.54 143.83,31.59 143.83,29.53
  Bottom 0.406: 128.03,33.51 132.38,33.51 133.19,32.7 | 133.19,32.7 Q6.3 | 128.03,33.51 128.08,33.46 | 128.08,33.46 128.03,33.51 | Q5.3 132.63,38.59 128.6,38.59 128.59,38.58 | 126.76,46.84 125.81,45.89 125.81,43.58 125.25,43.02 124.14,43.02 123.19,43.97 117,43.97 116.36,43.34 116.05,43.02 115.09,42.07 115.09,41.27 111.55,37.73 S19.1 111.55,37.51 114.38,34.69 JP2.6 | S20.1 111.52,7.62 113.51,7.62 115.24,5.89 120.35,5.82 | 120.35,5.82 C21.2 | 147.48,42.23 153.83,42.23 | 120.65,10.57 120.65,13.02 117.95,15.72 117.95,15.56 117.95,15.5 C20.- 117.93,15.38 | 147.32,7.78 147.24,7.86 | C19.- 149.22,34.26 148.59,34.29 147.32,34.29 146.84,34.77 143.99,37.62 143.99,40.32 143.66,40.34 R32.1 143.37,40.65 143.35,40.64 143.18,40.65 141.37,40.65 140.1,41.83 137.79,44.13 135.57,44.13 135.25,43.81 | 156.61,25.66 156.58,25.66 | 120.35,5.82 120.65,5.82 120.65,10.57 | 120.65,10.57 120.67,10.57 | 128.03,33.51 128.03,38.02 128.59,38.58 | 128.59,38.58 128.11,39.05 128.11,43.27 128.98,44.15 129.16,44.13 135.1,44.13 135.25,43.97 135.25,43.81 | S18.1 153.88,42.12 153.99,42.23 154.09,42.12 155.93,42.12 | 133.19,32.7 133.19,29.69 132.87,29.37 132.86,29.38 R34.1 132.49,29.69 130.11,29.69 U3.5 130.03,29.7 130.02,29.69 129.22,29.69 128.11,30.8 128.11,32.86 C24.1 | LED12.K 146.28,22.93 149.15,25.8 X3.2 149.2,25.85 149.22,25.88 146.61,28.49 146.37,28.49 146.37,28.56 | LED11.K 146.06,28.56 | 146.18,43.31 146.21,43.34 145.24,44.3 142.64,44.3 | 141.76,34.45 138.59,37.62 138.59,38.42 136.37,40.64 136.37,41.27 135.25,42.39 135.25,43.81 | 124.3,20.8 124.46,20.8 125.89,21.91 125.89,26.35 125.89,27.46 124.94,28.42 119.6,28.42 LED13.K 119.38,28.58 119.38,28.42 117.63,26.67 C23.1
  Bottom 0.406: 124.3,20.8 124.3,20.16 126.84,17.62 133.67,17.62 134.46,18.41 135.57,18.41 136.21,19.05 137.32,20.16 137.32,20.48 137.38,20.48 C22.1 137.48,20.41 137.48,20.32 140.11,20.32 R35.1 | 146.37,28.57 146.37,28.56 | 146.37,28.56 LED11.K | 146.37,28.57 146.3,28.57 LED11.K | 143.83,29.53 144.78,28.57 146.37,28.57 | 124.3,20.8 121.44,20.8 119.86,19.21 119.54,18.57 119.5,18.57 LED14.K | R39.1 143.18,8.43 144.32,7.29 D9.A 145.18,7.22 145.73,7.78 147.32,7.78 | 147.32,7.78 S17.1 | 132.87,30 132.87,28.57 133.35,28.1 133.35,27.3 134.3,26.35 136.37,26.35 137.79,24.92 137.79,20.95 137.48,20.64 | S19.2 | C23.1 | 128.11,33.66 128.11,33.62 128.08,33.46 | C23.1 | C23.1
  Bottom 0.61: 155.93,42.12 156.61,41.45 156.61,34.3 | 156.61,34.3 156.61,25.66 156.61,14.78 156.92,14.46 156.92,8.43 156.29,7.79 153.75,7.79 153.79,7.75 S17.1 147.44,7.75 147.4,7.79 | 147.4,42.08 147.44,42.12 S18.2 | 147.4,7.79 147.36,7.75 | 147.4,7.79 143.59,3.98 131.52,3.82 130.73,3.82 IC3.4 C21.2 | 147.4,42.08 147.36,42.12 | 147.4,42.08 146.18,43.31 146.13,43.35 | 142.64,44.3 140.1,46.84 126.76,46.84 | 156.61,34.3 153.75,34.3 C19.-
  other vias: 112.24,30.64
GND3  (via drill 0.8)  (3 unrouted)
  Bottom 0.305: 141.76,83.98 143.83,83.98 144.78,83.03 144.78,82.07 143.83,81.12 143.83,79.06
  Bottom 0.406: 128.03,83.04 132.38,83.04 133.19,82.23 | 133.19,82.23 Q8.3 | 128.03,83.04 128.08,82.99 | 128.08,82.99 128.03,83.04 | Q7.3 132.63,88.12 128.6,88.12 128.59,88.11 | 126.76,96.38 125.81,95.42 125.81,93.11 125.25,92.55 124.14,92.55 123.19,93.5 117,93.5 116.36,92.87 116.05,92.55 115.09,91.6 115.09,90.81 111.55,87.26 S27.1 111.55,87.04 114.38,84.22 JP4.6 | S28.1 111.52,57.15 113.51,57.15 115.24,55.42 120.35,55.34 | 120.35,55.34 C29.2 | 147.48,91.76 153.83,91.76 | 120.65,60.1 120.65,62.55 117.95,65.25 117.95,65.09 117.95,65.03 C28.- 117.93,64.91 | 147.32,57.31 147.24,57.39 | C27.- 149.22,83.78 148.59,83.82 147.32,83.82 146.84,84.3 143.99,87.15 143.99,89.85 143.66,89.87 R47.1 143.37,90.18 143.35,90.17 143.18,90.18 141.37,90.18 140.1,91.36 137.79,93.66 135.57,93.66 135.25,93.34 | 156.61,75.19 156.58,75.19 | 120.35,55.34 120.65,55.34 120.65,60.1 | 120.65,60.1 120.67,60.1 | 128.03,83.04 128.03,87.55 128.59,88.11 | 128.59,88.11 128.11,88.58 128.11,92.8 128.98,93.68 129.16,93.66 135.1,93.66 135.25,93.5 135.25,93.34 | S26.1 153.88,91.65 153.99,91.76 154.09,91.65 155.93,91.65 | 133.19,82.23 133.19,79.22 132.87,78.9 132.86,78.91 R49.1 132.49,79.22 130.11,79.22 U4.5 130.03,79.23 130.02,79.22 129.22,79.22 128.11,80.33 128.11,82.39 C32.1 | LED17.K 146.28,72.46 149.15,75.33 X4.2 149.2,75.38 149.22,75.41 146.61,78.02 146.37,78.02 146.37,78.09 | LED16.K 146.06,78.09 | 146.18,92.84 146.21,92.87 145.24,93.83 142.64,93.83 | 141.76,83.98 138.59,87.15 138.59,87.95 136.37,90.17 136.37,90.81 135.25,91.92 135.25,93.34 | 124.3,70.33 124.46,70.33 125.89,71.44 125.89,75.88 125.89,76.99 124.94,77.95 119.6,77.95 LED18.K 119.38,78.11 119.38,77.95 117.63,76.2 C31.1
  Bottom 0.406: 124.3,70.33 124.3,69.69 126.84,67.15 133.67,67.15 134.46,67.94 135.57,67.94 136.21,68.58 137.32,69.69 137.32,70.01 137.38,70.01 C30.1 137.48,69.94 137.48,69.85 140.11,69.85 R50.1 | 146.37,78.11 146.37,78.09 | 146.37,78.09 LED16.K | 146.37,78.11 146.3,78.11 LED16.K | 143.83,79.06 144.78,78.11 146.37,78.11 | 124.3,70.33 121.44,70.33 119.86,68.74 119.54,68.1 119.5,68.1 LED19.K | R54.1 143.18,57.96 144.32,56.82 D13.A 145.18,56.75 145.73,57.31 147.32,57.31 | 147.32,57.31 S25.1 | 132.87,79.53 132.87,78.11 133.35,77.63 133.35,76.83 134.3,75.88 136.37,75.88 137.79,74.45 137.79,70.48 137.48,70.17 | S27.2 | C31.1 | 128.11,83.19 128.11,83.15 128.08,82.99 | C31.1 | C31.1
  Bottom 0.61: 155.93,91.65 156.61,90.98 156.61,83.83 | 156.61,83.83 156.61,75.19 156.61,64.31 156.92,63.99 156.92,57.96 156.29,57.32 153.75,57.32 153.79,57.28 S25.1 147.44,57.28 147.4,57.32 | 147.4,91.61 147.44,91.65 S26.2 | 147.4,57.32 147.36,57.28 | 147.4,57.32 143.59,53.51 131.52,53.35 130.73,53.35 IC4.4 C29.2 | 147.4,91.61 147.36,91.65 | 147.4,91.61 146.18,92.84 146.13,92.88 | 142.64,93.83 140.1,96.38 126.76,96.38 | 156.61,83.83 153.75,83.83 C27.-
  other vias: 112.24,80.17
GND4  (via drill 0.8)  (3 unrouted)
  Bottom 0.305: 89.06,83.98 91.12,83.98 92.08,83.03 92.08,82.07 91.12,81.12 91.12,79.06
  Bottom 0.406: 75.33,83.04 79.68,83.04 80.49,82.23 | 80.49,82.23 Q10.3 | 75.33,83.04 75.37,82.99 | 75.37,82.99 75.33,83.04 | Q9.3 79.93,88.12 75.9,88.12 75.88,88.11 | 74.06,96.38 73.1,95.42 73.1,93.11 72.55,92.55 71.44,92.55 70.48,93.5 64.29,93.5 63.66,92.87 63.34,92.55 62.39,91.6 62.39,90.81 58.85,87.26 S35.1 58.85,87.04 61.67,84.22 JP5.6 | S36.1 58.81,57.15 60.8,57.15 62.53,55.42 67.64,55.34 | 67.64,55.34 C37.2 | 94.77,91.76 101.12,91.76 | 67.94,60.1 67.94,62.55 65.25,65.25 65.25,65.09 65.25,65.03 C36.- 65.23,64.91 | 94.61,57.31 94.53,57.39 | C35.- 96.52,83.78 95.89,83.82 94.61,83.82 94.14,84.3 91.28,87.15 91.28,89.85 90.95,89.87 R62.1 90.66,90.18 90.65,90.17 90.47,90.18 88.66,90.18 87.39,91.36 85.09,93.66 82.87,93.66 82.55,93.34 | 103.9,75.19 103.87,75.19 | 67.64,55.34 67.94,55.34 67.94,60.1 | 67.94,60.1 67.96,60.1 | 75.33,83.04 75.33,87.55 75.88,88.11 | 75.88,88.11 75.41,88.58 75.41,92.8 76.28,93.68 76.45,93.66 82.39,93.66 82.55,93.5 82.55,93.34 | S34.1 101.18,91.65 101.28,91.76 101.39,91.65 103.23,91.65 | 80.49,82.23 80.49,79.22 80.17,78.9 80.16,78.91 R64.1 79.78,79.22 77.4,79.22 U5.5 77.33,79.23 77.31,79.22 76.52,79.22 75.41,80.33 75.41,82.39 C40.1 | LED22.K 93.58,72.46 96.44,75.33 X5.2 96.49,75.38 96.52,75.41 93.9,78.02 93.66,78.02 93.66,78.09 | LED21.K 93.36,78.09 | 93.47,92.84 93.5,92.87 92.54,93.83 89.93,93.83 | 93.47,92.84 | 89.06,83.98 85.88,87.15 85.88,87.95 83.66,90.17 83.66,90.81 82.55,91.92 82.55,93.34 | 71.6,70.33 71.75,70.33 73.18,71.44 73.18,75.88 73.18,76.99 72.23,77.95 66.89,77.95 LED23.K 66.67,78.11 66.67,77.95 64.93,76.2 C39.1 | 71.6,70.33 71.6,69.69 74.14,67.15 80.96,67.15 81.76,67.94 82.87,67.94 83.5,68.58 84.61,69.69 84.61,70.01 C38.1 84.77,69.94 84.77,69.85 87.41,69.85 R65.1
  Bottom 0.406: 93.66,78.11 93.66,78.09 | 93.66,78.09 LED21.K | 93.66,78.11 93.59,78.11 LED21.K | 91.12,79.06 92.08,78.11 93.66,78.11 | 71.6,70.33 68.74,70.33 67.15,68.74 66.83,68.1 66.8,68.1 LED24.K | R69.1 90.47,57.96 91.61,56.82 D17.A 92.47,56.75 93.03,57.31 94.61,57.31 | 94.61,57.31 94.62,57.31 S33.1 | 80.17,79.53 80.17,78.11 80.64,77.63 80.64,76.83 81.6,75.88 83.66,75.88 85.09,74.45 85.09,70.48 84.77,70.17 | S35.2 | C39.1 | 75.41,83.19 75.41,83.15 75.37,82.99 | C39.1 | C39.1
  Bottom 0.61: 103.23,91.65 103.9,90.98 103.9,83.83 | 103.9,83.83 103.9,75.19 103.9,64.31 104.22,63.99 104.22,57.96 103.58,57.32 101.04,57.32 101.08,57.28 S33.1 94.73,57.28 94.69,57.32 | 94.69,91.61 94.73,91.65 S34.2 | 94.69,57.32 94.66,57.28 | 94.69,57.32 90.88,53.51 78.82,53.35 78.03,53.35 IC5.4 C37.2 | 94.69,91.61 94.66,91.65 | 94.69,91.61 93.47,92.84 93.42,92.88 | 89.93,93.83 87.39,96.38 74.06,96.38 | 103.9,83.83 101.04,83.83 C35.-
  other vias: 59.53,80.17
GND5  (via drill 0.8)  (3 unrouted)
  Bottom 0.305: 89.06,34.45 91.12,34.45 92.08,33.5 92.08,32.54 91.12,31.59 91.12,29.53
  Bottom 0.406: 75.33,33.51 79.68,33.51 80.49,32.7 | 80.49,32.7 Q12.3 | 75.33,33.51 75.37,33.46 | 75.37,33.46 75.33,33.51 | Q11.3 79.93,38.59 75.9,38.59 75.88,38.58 | 74.06,46.84 73.1,45.89 73.1,43.58 72.55,43.02 71.44,43.02 70.48,43.97 64.29,43.97 63.66,43.34 63.34,43.02 62.39,42.07 62.39,41.27 58.85,37.73 S43.1 58.85,37.51 61.67,34.69 JP6.6 | S44.1 58.81,7.62 60.8,7.62 62.53,5.89 67.64,5.82 | 67.64,5.82 C45.2 | 94.77,42.23 101.12,42.23 | 67.94,10.57 67.94,13.02 65.25,15.72 65.25,15.56 65.25,15.5 C44.- 65.23,15.38 | 94.61,7.78 94.53,7.86 | C43.- 96.52,34.26 95.89,34.29 94.61,34.29 94.14,34.77 91.28,37.62 91.28,40.32 90.95,40.34 R77.1 90.66,40.65 90.65,40.64 90.47,40.65 88.66,40.65 87.39,41.83 85.09,44.13 82.87,44.13 82.55,43.81 | 103.9,25.66 103.87,25.66 | 67.64,5.82 67.94,5.82 67.94,10.57 | 67.94,10.57 67.96,10.57 | 75.33,33.51 75.33,38.02 75.88,38.58 | 75.88,38.58 75.41,39.05 75.41,43.27 76.28,44.15 76.45,44.13 82.39,44.13 82.55,43.97 82.55,43.81 | S42.1 101.18,42.12 101.28,42.23 101.39,42.12 103.23,42.12 | 80.49,32.7 80.49,29.69 80.17,29.37 80.16,29.38 R79.1 79.78,29.69 77.4,29.69 U6.5 77.33,29.7 77.31,29.69 76.52,29.69 75.41,30.8 75.41,32.86 C48.1 | LED27.K 93.58,22.93 96.44,25.8 X6.2 96.49,25.85 96.52,25.88 93.9,28.49 93.66,28.49 93.66,28.56 | LED26.K 93.36,28.56 | 93.47,43.31 93.5,43.34 92.54,44.3 89.93,44.3 | 93.47,43.31 | 89.06,34.45 85.88,37.62 85.88,38.42 83.66,40.64 83.66,41.27 82.55,42.39 82.55,43.81 | 71.6,20.8 71.75,20.8 73.18,21.91 73.18,26.35 73.18,27.46 72.23,28.42 66.89,28.42 LED28.K 66.67,28.58 66.67,28.42 64.93,26.67 C47.1 | 71.6,20.8 71.6,20.16 74.14,17.62 80.96,17.62 81.76,18.41 82.87,18.41 83.5,19.05 84.61,20.16 84.61,20.48 84.68,20.48 C46.1 84.77,20.41 84.77,20.32 87.41,20.32 R80.1
  Bottom 0.406: 93.66,28.57 93.66,28.56 | 93.66,28.56 LED26.K | 93.66,28.57 93.59,28.57 LED26.K | 91.12,29.53 92.08,28.57 93.66,28.57 | 71.6,20.8 68.74,20.8 67.15,19.21 66.83,18.57 66.8,18.57 LED29.K | R84.1 90.47,8.43 91.61,7.29 D21.A 92.47,7.22 93.03,7.78 94.61,7.78 | 94.61,7.78 94.62,7.78 S41.1 | 80.17,30 80.17,28.57 80.64,28.1 80.64,27.3 81.6,26.35 83.66,26.35 85.09,24.92 85.09,20.95 84.77,20.64 | S43.2 | C47.1 | 75.41,33.66 75.41,33.62 75.37,33.46 | C47.1 | C47.1
  Bottom 0.61: 103.23,42.12 103.9,41.45 103.9,34.3 | 103.9,34.3 103.9,25.66 103.9,14.78 104.22,14.46 104.22,8.43 103.58,7.79 101.04,7.79 101.08,7.75 S41.1 94.73,7.75 94.69,7.79 | 94.69,42.08 94.73,42.12 S42.2 | 94.69,7.79 94.66,7.75 | 94.69,7.79 90.88,3.98 78.82,3.82 78.03,3.82 IC6.4 C45.2 | 94.69,42.08 94.66,42.12 | 94.69,42.08 93.47,43.31 93.42,43.35 | 89.93,44.3 87.39,46.84 74.06,46.84 | 103.9,34.3 101.04,34.3 C43.-
  other vias: 59.53,30.64
N$1
  Bottom 0.406: U1.8 25.4,37.31 26.66,36.05 29.54,36.05 29.69,36.2 Q1.1 33.26,34.78 R9.2
N$2
  Bottom 0.406: Q1.2 30.88,39.23 32.15,37.86 32.23,37.78 32.23,37.31 36.5,33.03 R8.2 38.11,32.72 37.31,31.91 37.31,28.51 C1.2 | Q1.2 29.53,39.3 | R7.2 28.5,42.47 29.53,41.43 29.53,39.37 29.45,39.29 Q1.2
N$3
  Bottom 0.406: D4.A 47.15,19.37 45.98,20.53 X1.1 43.66,20.93 43.15,20.93 42.07,19.84 40.01,19.84 39.69,20.16 39.69,22.38 D5.A
N$4
  Bottom 0.406: 35.24,29.53 35.31,29.53 R5.2 | 35.24,29.53 35.24,28.99 | R5.2 35.24,29.46 | 35.65,21.75 35.72,21.75 | 35.65,21.75 35.02,21.75 35.02,23.56 33.81,24.77 33.81,27.62 | D5.C 37.62,21.75 35.65,21.75 | 35.65,21.75 C1.1 37.72,19.68 37.94,19.68 R3.2 | 35.24,29.53 35.26,29.54 R5.2 | 35.24,29.53 33.83,28.59 33.83,28.11 33.81,28.1 33.81,27.62 | 33.81,27.62 D2.C
N$5
  Bottom 0.406: U1.3 25.39,24.62 26.67,23.34 29.05,23.34 29.54,22.87 C4.2
N$6
  Bottom 0.406: Q2.1 30.4,32.47 31.91,30.96 D2.A
N$7  (via drill 0.5)
  other vias: 27.21,41.09
N$8
  Bottom 0.406: IC1.7 IC1.8 IC1.1 R1.2
N$9  (via drill 0.5)
  other vias: 9.29,17.96
N$10
  Bottom 0.406: IC1.6 26.43,8.43 25.16,9.7 20.88,9.7 R1.1 18.51,10.95 | R11.2 18.64,15.88 16.63,15.88 C5.+ 17.3,14.1 17.3,12.54 18.89,10.95 18.51,10.95 | 18.51,10.95 18.57,10.95
N$11
  Bottom 0.406: IC1.5 R2.2 R10.2
N$12
  Bottom 0.406: IC1.2 25.95,10.97 27.38,9.7 32.46,9.7 33.58,10.81 L1.1 | 37.94,14.45 39.07,15.54 D1.C
  Bottom 0.813: L1.1 33.73,13.73 34.45,14.45 37.94,14.45
N$13
  Bottom 0.406: D4.C 44.61,14.76 43.66,13.81 40.96,13.81 40.32,14.45 40.32,16.19 39.69,16.83 38.42,16.83 37.45,15.89 32.38,15.88 31.99,15.48 C7.2 32,15.4 | R11.1 25.97,15.4 26.51,15.4 26.99,14.92 30.96,14.92 31.43,15.4 32,15.4 | 32,15.4 32.07,15.4
N$14
  Bottom 0.61: C6.1 IC1.3
N$15  (via drill 0.5)
  other vias: 42.28,15.59
N$16
  Bottom 0.305: R15.2 9.84,16.03 13.65,19.84 13.65,20.64
  Bottom 0.406: LED4.A 14.07,21.11 13.65,20.64 | R15.2
N$17
  Bottom 0.406: R12.1 37.94,36.35 38.73,36.35 40.96,34.13 40.96,31.11 40.89,31.11 LED1.A
N$18
  Bottom 0.406: LED2.A 40.86,18.57 40.32,18.57 40.16,18.41 36.99,18.41 36.67,18.1 31.27,18.1 30.32,17.14 R13.2 | R13.2 | R13.2
N$19
  Bottom 0.406: LED3.A 14.02,31.16 14.31,31.46 R14.2
N$20
  Bottom 0.406: LED5.A 30.27,24.66 31.27,23.65 31.27,22.54 30.16,21.43 28.89,21.43 27.62,20.16 27.62,19.84 R16.1
N$21  (via drill 0.6, 0.8)
  Top 0.406: v19.21,27.15 v19.21,36.04
  Bottom 0.305: 22.54,45.88 21.11,44.45 21.11,40.01
  Bottom 0.406: R12.2 33.66,45.88 22.54,45.88 | 21.11,40.01 20.32,39.21 20.32,37.15 v19.21,36.04 | U1.17 17.13,27.16 17.14,27.15 v19.21,27.15
N$22
  Bottom 0.305: 21.75,19.68 23.02,18.41 28.1,18.41 29.37,19.68
  Bottom 0.406: U1.16 17.24,29.53 19.68,29.53 21.27,27.94 21.75,27.46 21.75,19.68 | R13.1 | R13.1 | 29.37,19.68 R13.1
N$23
  Bottom 0.406: U1.14 17,34.78 16.95,34.89 R14.1
N$24  (via drill 0.8)
  Top 0.406: v19.21,44.29 v19.21,41.12
  Bottom 0.305: 7.78,14.45 7.78,14.29 9.37,12.7 9.37,10.32
  Bottom 0.406: U1.13 18.26,37.31 19.2,38.24 19.2,39.23 v19.21,41.12 | v19.21,44.29 17.94,45.56 5.87,45.56 3.02,42.7 3.02,10.32 3.97,9.37 8.41,9.37 9.37,10.32 | 7.78,14.45 R15.1
N$25
  Bottom 0.406: 27.3,22.08 27.3,22.12 LED5.K | U1.2 27.3,22.08 | 27.3,22.08 27.3,22.07
N$26
  Bottom 0.406: U2.8 25.4,86.84 26.66,85.58 29.54,85.58 29.69,85.72 Q3.1 33.26,84.31 R4.2
N$27
  Bottom 0.406: Q3.2 30.88,88.75 32.15,87.39 32.23,87.31 32.23,86.84 36.5,82.56 R17.2 38.11,82.25 37.31,81.44 37.31,78.04 C2.2 | Q3.2 29.53,88.83 | R18.2 28.5,92 29.53,90.96 29.53,88.9 29.45,88.82 Q3.2
N$28
  Bottom 0.406: U2.3 25.39,74.15 26.67,72.87 29.05,72.87 29.54,72.4 C9.2
N$29
  Bottom 0.406: JP3.4 9.38,29.38 10.95,30.96 10.95,32.07 12.06,33.18 12.06,35.24 13.02,36.2 14.92,36.2 15.08,36.35 15.24,36.51 15.24,36.83 15.24,38.89 16.19,39.85 17.14,39.85 17.13,39.86 U1.12
N$30
  Bottom 0.406: U1.11 16.59,42.31 13.81,39.53 11.59,39.53 10,37.94 10,37.15 11.27,35.88 11.27,33.5 9.68,31.91 9.05,31.91 9.04,31.92 JP3.5
N$31
  Bottom 0.406: JP3.3 10.33,26.84 13.34,29.84 14.61,29.84 15.56,30.8 15.72,30.96 19.84,30.96 23.65,27.15 24.61,27.15 24.62,27.16 U1.4
N$32
  Bottom 0.406: JP3.2 8.24,24.3 5.56,24.29 5.56,27.3 6.35,28.1 10.32,28.1 11.75,29.53 11.75,30.8 12.54,31.59 | 12.54,31.59 13.02,32.07 13.02,33.18 13.49,33.66 15.08,33.66 16.5,32.24 | 16.5,32.24 17.14,32.23 19.37,32.23 19.37,32.86 C10.2 | 16.5,32.24 U1.15 | 12.54,31.59 12.54,31.75
N$33
  Bottom 0.406: Q4.1 30.4,82 31.91,80.49 D8.A
N$34
  Bottom 0.406: R5.1 35.39,32.4 35.4,32.38 34.77,31.75 33.34,31.75 30.47,34.62 Q2.2 29.13,30.81 R6.2 29.86,29.38 29.61,29.13 C4.1
N$35
  Bottom 0.406: U2.11 16.59,91.84 13.81,89.06 11.59,89.06 10,87.47 10,86.68 11.27,85.41 11.27,83.03 9.68,81.44 9.05,81.44 9.04,81.45 JP1.5
N$36
  Bottom 0.406: JP1.3 10.33,76.37 13.34,79.38 14.61,79.38 15.56,80.33 | 15.56,80.33 | 15.56,80.33 15.72,80.49 19.84,80.49 23.65,76.68 24.61,76.68 24.62,76.69 U2.4
N$37
  Bottom 0.406: JP1.4 9.38,78.91 10.95,80.49 10.95,81.6 12.06,82.71 12.06,84.77 13.02,85.72 14.92,85.72 15.08,85.88 15.24,86.04 15.24,86.36 15.24,88.42 16.19,89.38 17.14,89.38 17.13,89.39 U2.12
N$38
  Bottom 0.406: JP1.2 8.24,73.83 5.56,73.82 5.56,76.83 6.35,77.63 10.32,77.63 11.75,79.06 11.75,80.33 12.54,81.12 | 12.54,81.12 13.02,81.6 13.02,82.71 13.49,83.19 15.08,83.19 16.5,81.77 | 16.5,81.77 17.14,81.76 19.37,81.76 19.37,82.39 C16.2 | 16.5,81.77 U2.15 | 12.54,81.12 12.54,81.28
N$39
  Bottom 0.406: R21.1 35.39,81.93 35.4,81.92 34.77,81.28 33.34,81.28 30.47,84.15 Q4.2 29.13,80.34 R19.2 29.86,78.91 29.61,78.66 C9.1
N$40
  Bottom 0.406: 35.24,79.06 35.31,79.06 R21.2 | 35.24,79.06 35.24,78.52 | R21.2 35.24,78.99 | 35.65,71.28 35.72,71.28 | 35.65,71.28 35.02,71.28 35.02,73.09 33.81,74.3 33.81,77.15 | D7.C 37.62,71.28 35.65,71.28 | 35.65,71.28 C2.1 37.72,69.22 37.94,69.22 R20.2 | 35.24,79.06 35.26,79.07 R21.2 | 35.24,79.06 33.83,78.12 33.83,77.64 33.81,77.63 33.81,77.15 | 33.81,77.15 D8.C
N$41
  Bottom 0.406: IC2.7 IC2.8 IC2.1 R22.2
N$42
  Bottom 0.406: IC2.6 26.43,57.96 25.16,59.23 20.88,59.23 R22.1 18.51,60.48 | R25.2 18.64,65.41 16.63,65.41 C12.+ 17.3,63.63 17.3,62.07 18.89,60.48 18.51,60.48 | 18.51,60.48 18.57,60.48
N$43
  Bottom 0.406: IC2.5 R23.2 R24.2
N$44
  Bottom 0.406: IC2.2 25.95,60.5 27.38,59.23 32.46,59.23 33.58,60.34 L2.1 | 37.94,63.98 39.07,65.07 D3.C
  Bottom 0.813: L2.1 33.73,63.26 34.45,63.98 37.94,63.98
N$45
  Bottom 0.61: C13.1 IC2.3
N$46
  Bottom 0.406: D6.C 44.61,64.29 43.66,63.34 40.96,63.34 40.32,63.98 40.32,65.72 39.69,66.36 38.42,66.36 37.45,65.42 32.38,65.41 31.99,65.01 C14.2 | R25.1 25.97,64.93 26.51,64.93 26.99,64.45 30.96,64.45 31.43,64.93 C14.2 | C14.2 32.07,64.93
N$47
  Bottom 0.406: D6.A 47.15,68.9 45.98,70.06 X2.1 43.66,70.46 43.15,70.46 42.07,69.37 40.01,69.37 39.69,69.69 39.69,71.91 D7.A
N$48  (via drill 0.5)
  other vias: 27.21,90.62
N$49  (via drill 0.5)
  other vias: 9.29,67.5
N$50  (via drill 0.5)
  other vias: 42.28,65.11
N$51
  Bottom 0.406: R26.1 37.94,85.88 38.73,85.88 40.96,83.66 40.96,80.64 40.89,80.64 LED6.A
N$52  (via drill 0.6, 0.8)
  Top 0.406: v19.21,76.68 v19.21,85.57
  Bottom 0.305: 22.54,95.41 21.11,93.98 21.11,89.53
  Bottom 0.406: R26.2 33.66,95.41 22.54,95.41 | 21.11,89.53 20.32,88.74 20.32,86.68 v19.21,85.57 | U2.17 17.13,76.69 17.14,76.68 v19.21,76.68
N$53
  Bottom 0.305: 21.75,69.22 23.02,67.94 28.1,67.94 29.37,69.22
  Bottom 0.406: U2.16 17.24,79.06 19.68,79.06 21.27,77.47 21.75,76.99 21.75,69.22 | R27.1 | R27.1 | 29.37,69.22 R27.1
N$54
  Bottom 0.406: U2.14 17,84.31 16.95,84.42 R28.1
N$55  (via drill 0.8)
  Top 0.406: v19.21,93.82 v19.21,90.65
  Bottom 0.305: 7.78,63.98 7.78,63.82 9.37,62.23 9.37,59.85
  Bottom 0.406: U2.13 18.26,86.84 19.2,87.78 19.2,88.75 v19.21,90.65 | v19.21,93.82 17.94,95.09 5.87,95.09 3.02,92.23 3.02,59.85 3.97,58.9 8.41,58.9 9.37,59.85 | 7.78,63.98 R29.1
N$56
  Bottom 0.406: LED8.A 14.02,80.69 14.31,80.99 R28.2
N$57
  Bottom 0.305: R29.2 9.84,65.56 13.65,69.37 13.65,70.17
  Bottom 0.406: LED9.A 14.07,70.64 13.65,70.17 | R29.2
N$58
  Bottom 0.406: LED7.A 40.86,68.1 40.32,68.1 40.16,67.94 36.99,67.94 36.67,67.63 31.27,67.63 30.32,66.67 R27.2 | R27.2 | R27.2
N$59
  Bottom 0.406: 27.3,71.61 27.3,71.65 LED10.K | U2.2 27.3,71.61 | 27.3,71.61 27.3,71.6
N$60
  Bottom 0.406: LED10.A 30.27,74.19 31.27,73.18 31.27,72.07 30.16,70.96 28.89,70.96 27.62,69.69 27.62,69.37 R30.1
N$61
  Bottom 0.406: U3.8 130.81,37.31 132.07,36.05 134.95,36.05 135.1,36.2 Q5.1 138.67,34.78 R31.2
N$62
  Bottom 0.406: Q5.2 136.29,39.23 137.56,37.86 137.64,37.78 137.64,37.31 141.91,33.03 R32.2 143.52,32.72 142.72,31.91 142.72,28.51 C17.2 | Q5.2 134.94,39.3 | R33.2 133.91,42.47 134.94,41.43 134.94,39.37 134.86,39.29 Q5.2
N$63
  Bottom 0.406: U3.3 130.8,24.62 132.08,23.34 134.46,23.34 134.95,22.87 C18.2
N$64
  Bottom 0.406: Q6.1 135.81,32.47 137.32,30.96 D12.A
N$65
  Bottom 0.406: U3.11 122,42.31 119.22,39.53 117,39.53 115.41,37.94 115.41,37.15 116.68,35.88 116.68,33.5 115.09,31.91 114.46,31.91 114.44,31.92 JP2.5
N$66
  Bottom 0.406: JP2.3 115.74,26.84 118.75,29.84 120.02,29.84 120.97,30.8 121.13,30.96 125.25,30.96 129.06,27.15 130.02,27.15 130.03,27.16 U3.4
N$67
  Bottom 0.406: JP2.4 114.79,29.38 116.36,30.96 116.36,32.07 117.47,33.18 117.47,35.24 118.43,36.2 120.33,36.2 120.49,36.35 120.65,36.51 120.65,36.83 120.65,38.89 121.6,39.85 122.56,39.85 122.54,39.86 U3.12
N$68
  Bottom 0.406: JP2.2 113.65,24.3 110.97,24.29 110.97,27.3 111.76,28.1 115.73,28.1 117.16,29.53 117.16,30.8 117.95,31.59 | 117.95,31.59 118.43,32.07 118.43,33.18 118.9,33.66 120.49,33.66 121.91,32.24 | 121.91,32.24 122.56,32.23 124.78,32.23 124.78,32.86 C24.2 | 121.91,32.24 U3.15 | 117.95,31.59 117.95,31.75
N$69
  Bottom 0.406: R36.1 140.8,32.4 140.81,32.38 140.18,31.75 138.75,31.75 135.88,34.62 Q6.2 134.54,30.81 R34.2 135.27,29.38 135.02,29.13 C18.1
N$70
  Bottom 0.406: 140.65,29.53 140.72,29.53 R36.2 | 140.65,29.53 140.65,28.99 | R36.2 140.65,29.46 | 141.06,21.75 141.13,21.75 | 141.06,21.75 140.43,21.75 140.43,23.56 139.22,24.77 139.22,27.62 | D11.C 143.03,21.75 141.06,21.75 | 141.06,21.75 C17.1 143.13,19.68 143.35,19.68 R35.2 | 140.65,29.53 140.67,29.54 R36.2 | 140.65,29.53 139.24,28.59 139.24,28.11 139.22,28.1 139.22,27.62 | 139.22,27.62 D12.C
N$71
  Bottom 0.406: IC3.7 IC3.8 IC3.1 R37.2
N$72
  Bottom 0.406: IC3.6 131.84,8.43 130.57,9.7 126.28,9.7 R37.1 123.92,10.95 | R40.2 124.05,15.88 122.04,15.88 C20.+ 122.71,14.1 122.71,12.54 124.3,10.95 123.92,10.95 | 123.92,10.95 123.98,10.95
N$73
  Bottom 0.406: IC3.5 R38.2 R39.2
N$74
  Bottom 0.406: IC3.2 131.37,10.97 132.79,9.7 137.87,9.7 138.99,10.81 L3.1 | 143.35,14.45 144.48,15.54 D9.C
  Bottom 0.813: L3.1 139.14,13.73 139.86,14.45 143.35,14.45
N$75
  Bottom 0.61: C21.1 IC3.3
N$76
  Bottom 0.406: D10.C 150.02,14.76 149.07,13.81 146.37,13.81 145.73,14.45 145.73,16.19 145.1,16.83 143.83,16.83 142.86,15.89 137.79,15.88 137.4,15.48 C22.2 137.41,15.4 | R40.1 131.38,15.4 131.92,15.4 132.4,14.92 136.37,14.92 136.84,15.4 137.41,15.4 | 137.41,15.4 137.48,15.4
N$77
  Bottom 0.406: D10.A 152.56,19.37 151.39,20.53 X3.1 149.07,20.93 148.56,20.93 147.48,19.84 145.41,19.84 145.1,20.16 145.1,22.38 D11.A
N$78  (via drill 0.5)
  other vias: 132.62,41.09
N$79  (via drill 0.5)
  other vias: 114.7,17.96
N$80  (via drill 0.5)
  other vias: 147.69,15.59
N$81
  Bottom 0.406: R41.1 143.35,36.35 144.15,36.35 146.37,34.13 146.37,31.11 146.3,31.11 LED11.A
N$82  (via drill 0.6, 0.8)
  Top 0.406: v124.62,27.15 v124.62,36.04
  Bottom 0.305: 127.95,45.88 126.52,44.45 126.52,40.01
  Bottom 0.406: R41.2 139.06,45.88 127.95,45.88 | 126.52,40.01 125.73,39.21 125.73,37.15 v124.62,36.04 | U3.17 122.54,27.16 122.56,27.15 v124.62,27.15
N$83
  Bottom 0.305: 127.16,19.68 128.43,18.41 133.51,18.41 134.78,19.68
  Bottom 0.406: U3.16 122.65,29.53 125.09,29.53 126.68,27.94 127.16,27.46 127.16,19.68 | R42.1 | R42.1 | 134.78,19.68 R42.1
N$84
  Bottom 0.406: U3.14 122.41,34.78 122.36,34.89 R43.1